# Allegro board test_fixture_4.brd

Outline 81.28 x 111.76 mm; copper layers: TOP, GROUND, MIDDLE, POWER, BOTTOM. Coordinates in mm from the lower left corner of the outline.
Outline path: rectangle 0,0 81.28,111.76

## Design rules (mm)
nets with their own width: min track width 0.152; nets ADP9 MISO2 MOSI1 MOSI2 N05337 N15041 N15045 N15127 N15131 N15240 N15268 N18999 N19124 N19488 N19578 N19618 N19633 N22932 N24595 N24653 N25786 N25790 N49174 N49178 N49182 N51133 N52935 N55207 N55211 N55215 N55219 N55223 N55410 N55414 N55418 N55422 N55426 N55430 N55434 N55502 N55506 N55510 N55514 N55518 N55522 N55526 N55530 N55534 N55538 N55542 N55546 N55550 N55554 N55558 N55562 N55566 N55570 N78033 N78056 N78319 N121520 OUTA PTE4 R1IN R1OUT R2IN R2OUT RXD1 RXD2 SPSCK1 SPSCK2 SS1_N SS2_N T1OUT T2OUT TXD1 TXD2 VIN VOUT VSS
nets with their own width: min track width 0.203; nets V3_3 V5_5 VCC
nets with their own width: min track width 0.254; nets AGND

## Placement (name value [footprint] x y rotation side)
C1  0.1u  [CAP196]  69.6 94.61 0 top
C2  10u  [CAP196]  48.39 87 0 top
C3  0.1u  [CAP196]  25.53 93.85 0 top
C4  0.1u  [CAP196]  25.53 99.95 0 top
C5  0.1u  [CAP196]  40.01 87 0 top
C6  10u  [CAP196]  25.53 90.3 180 top
C7  0.1u  [CAP196]  32.13 87 0 top
C9  0.1u  [CAP196]  22.86 57.91 0 top
C10  0.1u  [CAP196]  29.59 57.91 0 top
C11  0.1u  [CAP196]  43.05 57.91 0 top
C12  0.1u  [CAP196]  36.32 57.91 0 top
C13  1n  [CAP196]  49.78 57.91 0 top
C14  0.1u  [CAP196]  63.12 57.91 0 top
C16  2u  [CAP196]  23.88 74.93 90 top
C17  0.1u  [CAP196]  56.52 57.91 0 top
C18  10u  [CAP196]  25.53 81.15 0 top
C22  0.47u  [CAP196]  69.6 88.27 0 top
C23  33u  [CAP196]  69.72 57.91 0 top
D1  LED  [CAP196]  12.32 73.66 0 top
D2  LED  [CAP196]  28.57 71.12 0 top
D3  LED  [CAP196]  35.31 71.12 0 top
J1  HEADER 32  [32_PINS_CIR_CONN_RIGHT_ANGLE]  75.69 19.18 90 top
J3  HEADER 32  [32_PINS_CIR_CONN_RIGHT_ANGLE]  15.62 19.18 90 top
J5  CON10A  [CONN10]  57.78 8.26 0 top
J6  CON2  [CAP196]  12.32 70.48 180 top
NOREF  -  [unnamed]  78.74 109.22 0 top
NOREF#2  -  [unnamed]  78.74 2.54 0 top
NOREF#3  -  [unnamed]  2.54 109.22 0 top
NOREF#4  -  [unnamed]  2.54 2.54 0 top
R1  100k  [RES400]  13.84 93.85 0 top
R2  1.26k  [RES400]  58.17 90.3 0 top
R3  100k  [RES400]  18.29 93.85 0 top
R4  22.17k  [RES400]  54.23 90.3 0 top
R5  11.1k  [RES400]  62.87 90.42 0 top
R6  1k  [RES400]  44.2 82.55 90 top
R7  1k  [RES400]  40.13 72.39 270 top
R8  10k  [RES400]  47.75 29.34 0 top
R9  10k  [RES400]  47.62 22.23 180 top
R10  10k  [RES400]  64.52 28.19 0 top
R11  10k  [RES400]  64.39 43.05 0 top
R12  1k  [RES400]  17.4 66.67 0 top
U1  LM124A  [DIP14_3]  33.27 94.49 90 top
U3  MAX3222  [DIP18_3]  40.26 52.58 270 top
U4  MC9S08QE128_64  [MC9S08QE128_V2]  9.78 32.89 0 top
U5  CAT24C02  [DIP8_3]  53.21 39.24 0 top
U6  max550acpa  [DIP8_3]  51.18 51.69 0 top
U7  LT323/TO220  [TO220AB]  18.67 83.06 270 top
U8  LM3940/TO220  [TO220AB]  58.17 84.84 90 top

## Library data of the parts
C1-C7 C14 C16-C18 C22 C23 = C: Tolerance: ***; User Part Number: ***
C9-C13 = CAP: Tolerance: ***; User Part Number: ***
D1-D3 = LED: Tolerance: ***; User Part Number: ***
J1 J3 = HEADER 32
J5 = CON10A: User Part Number: ***
J6 = CON2: Tolerance: ***; User Part Number: ***
R1-R7 R12 = R: Tolerance: ***; User Part Number: ***
R8-R11 = RESISTOR: Tolerance: ***; User Part Number: ***
U1 = LM124A: Tolerance: ***; User Part Number: ***
U3 = MAX3222_2: Tolerance: ***; User Part Number: ***
U4 = MC9S08QE128_11
U5 = CAT24C02_3: Tolerance: ***; User Part Number: ***
U6 = max550acpa_3: Tolerance: ***; User Part Number: ***
U7 = LT323/TO220_0
U8 = LM3940/TO220_0

## Footprints (pads in the part's own frame, mm; a bottom-side part is the same pattern mirrored in y, then rotated)
32_PINS_CIR_CONN_RIGHT_ANGLE
  round 1.016 hole 0.711: 1(4,6) 2(4,4) 3(6,6) 4(6,4) 5(8,6) 6(8,4) 7(10,6) 8(10,4) 9(12,6) 10(12,4) 11(14,6) 12(14,4) 13(16,6) 14(16,4) 15(18,6) 16(18,4) 17(20,6) 18(20,4) 19(22,6) 20(22,4) 21(24,6) 22(24,4) 23(26,6) 24(26,4) 25(28,6) 26(28,4) 27(30,6) 28(30,4) 29(32,6) 30(32,4) 31(34,6) 32(34,4)
CAP196
  round 1.524 hole 0.914: 1(0,0) 2(0,2.54)
CONN10
  round 1.524 hole 0.914: 1(0,0) 2(0,2.54) 3(2.54,0) 4(2.54,2.54) 5(5.08,0) 6(5.08,2.54) 7(7.62,0) 8(7.62,2.54) 9(10.16,0) 10(10.16,2.54)
DIP8_3
  rect 1.524x1.524 hole 0.914: 1(0,0)
  round 1.524 hole 0.914: 2(0,-2.54) 3(0,-5.08) 4(0,-7.62) 5(7.62,-7.62) 6(7.62,-5.08) 7(7.62,-2.54) 8(7.62,0)
DIP14_3
  rect 1.524x1.524 hole 0.914: 1(0,0)
  round 1.524 hole 0.914: 2(0,-2.54) 3(0,-5.08) 4(0,-7.62) 5(0,-10.16) 6(0,-12.7) 7(0,-15.24) 8(7.62,-15.24) 9(7.62,-12.7) 10(7.62,-10.16) 11(7.62,-7.62) 12(7.62,-5.08) 13(7.62,-2.54) 14(7.62,0)
DIP18_3
  rect 1.524x1.524 hole 0.914: 1(0,0)
  round 1.524 hole 0.914: 2(0,-2.54) 3(0,-5.08) 4(0,-7.62) 5(0,-10.16) 6(0,-12.7) 7(0,-15.24) 8(0,-17.78) 9(0,-20.32) 10(7.62,-20.32) 11(7.62,-17.78) 12(7.62,-15.24) 13(7.62,-12.7) 14(7.62,-10.16) 15(7.62,-7.62) 16(7.62,-5.08) 17(7.62,-2.54) 18(7.62,0)
MC9S08QE128_V2
  round 1.524 hole 1.067: 1(8.026,0) 2(10.033,0) 3(8.026,-2.007) 4(10.033,-2.007) 5(8.026,-4.013) 6(10.033,-4.013) 7(8.026,-6.02) 8(10.033,-6.02) 9(8.026,-8.026) 10(10.033,-8.026) 11(8.026,-10.033) 12(10.033,-10.033) 13(8.026,-12.04) 14(10.033,-12.04) 15(8.026,-14.046) 16(10.033,-14.046) 17(12.04,-20.066) 18(12.04,-18.059) 19(14.046,-20.066) 20(14.046,-18.059) 21(16.053,-20.066) 22(16.053,-18.059) 23(18.059,-20.066) 24(18.059,-18.059) 25(20.066,-20.066) 26(20.066,-18.059) 27(22.073,-20.066) 28(22.073,-18.059) 29(24.079,-20.066) 30(24.079,-18.059) 31(26.086,-20.066) 32(26.086,-18.059) 33(32.664,-14.046) 34(30.658,-14.046) 35(32.664,-12.04) 36(30.658,-12.04) 37(32.664,-10.033) 38(30.658,-10.033) 39(32.664,-8.026) 40(30.658,-8.026) 41(32.664,-6.02) 42(30.658,-6.02) 43(32.664,-4.013) 44(30.658,-4.013) 45(32.664,-2.007) 46(30.658,-2.007) 47(32.664,0) 48(30.658,0) 49(26.086,5.359) 50(26.086,3.353) 51(24.079,5.359) 52(24.079,3.353) 53(22.073,5.359) 54(22.073,3.353) 55(20.066,5.359) 56(20.066,3.353) 57(18.059,5.359) 58(18.059,3.353) 59(16.053,5.359) 60(16.053,3.353) 61(14.046,5.359) 62(14.046,3.353) 63(12.04,5.359) 64(12.04,3.353)
RES400
  round 1.651 hole 1.067: 1(0,0) 2(0,10.16)
TO220AB
  round 2.032 hole 1.397: 1(0,0) 2(-2.54,0) 3(-5.08,0)
unnamed
  round 0.635 hole 3.175 unplated: (0,0)

## Nets
AGND: C1.1 C3.1 C4.1 C11.2 C12.2 C13.2 C14.1 C16.1 C17.1 C18.1 C22.1 C23.1 D1.2(CATHODE) D2.2(CATHODE) D3.2(CATHODE) J1.9 J1.10 J1.11 J6.2 R3.1 U1.11(V-) U3.16 U4.9(VREFL) U4.10(VSSAD) U4.11(VSS_2) U5.1(A0) U5.2(A1) U5.3(A2) U6.1(GND) U7.2 U8.2
V3_3: C13.1 C14.2 C17.2 C23.2 J1.6 J1.7 J1.8 R7.2 R8.1 R9.1 R10.2 R11.2 U3.1(E\N\) U3.17(VCC) U3.18(S\H\D\N\) U4.6(VDD) U4.7(VDDAD) U4.8(VREFH) U4.40(VDD_2) U5.8 U6.8(VDD) U8.3(OUT)
V5_5: C1.2 C18.2 C22.2 R1.2 R6.2 U1.4(V+) U7.3(VOUT) U8.1(IN)
VCC: C16.2 J6.1 R12.2 U7.1(VIN)
VIN: C6.1 J3.32
VSS: U5.4
ADP9: J3.21 U4.37(PTA7/TPM2CH2/ADP9)
MISO2: J3.6 J5.5 U4.46(PTD2/KBI2P2/MISO2)
MOSI1: J3.28 U4.59(PTE1/MOSI1) U6.4(DIN)
MOSI2: J1.1 J5.1 U4.1(PTD1/KBI2P1/MOSI2)
OUTA: U6.2(OUTA)
PTE4: J3.18 U4.39(PTE4)
R1IN: U3.14(R1IN)
R1OUT: U3.13(R1OUT) U4.34(PTB0/KBI1P4/RXD1/ADP4)
R2IN: U3.9(R2IN)
R2OUT: U3.10(R2OUT) U4.52(PTC6/RXD2/ACMP2+)
RXD1: J3.2
RXD2: J3.13
SPSCK1: J3.29 U4.60(PTE0/TPM2CLK/SPSCK1) U6.5(SCLK)
SPSCK2: J1.2 J5.3 U4.2(PTD0/KBI2P0/SPSCK2)
SS1_N: U6.3(CS_N)
SS2_N: J3.10 J5.9 U4.45(PTD3/KBI2P3/S\S\2\)
T1OUT: U3.15(T1OUT)
T2OUT: U3.8(T2OUT)
TXD1: J3.1 U3.12(T1IN) U4.33(PTB1/KBI1P5/TXD1/ADP5)
TXD2: J3.12 U3.11(T2IN) U4.51(PTC7/TXD2/ACMP2-)
VOUT: C2.2 J3.11 U4.50(PTA0/KBI1P0/TPM1CH0/ADP0/ACMP1)
N05337: J1.4 R11.1 U4.4(PTH6/SCL2) U5.6(SCL)
N15041: C9.1 U3.2(C1+)
N15045: C9.2 U3.4(C1-)
N15127: C10.1 U3.5(C2+)
N15131: C10.2 U3.6(C2-)
N15240: C11.1 U3.3(V+)
N15268: C12.1 U3.7(V-)
N18999: C3.2 R1.1 R3.2 U1.2(-)
N19124: C4.2 R2.2 U1.1(OUT) U1.3(+) U1.5(+)
N19488: C5.1 C7.1 R2.1 R5.1
N19578: C5.2 R4.2 U1.6(-)
N19618: C2.1 C7.2 R4.1 U1.7(OUT)
N19633: C6.2 R5.2
N22932: J1.5 U4.5(PTE7/TPM3CLK)
N24595: J3.14 U4.53(PTE3/S\S\1\)
N24653: J1.31 U4.54(PTE2/MISO1)
N25786: J1.12 R8.2 U4.12(PTB7/SCL1/EXTAL)
N25790: J1.13 R9.2 U4.13(PTB6/SDA1/XTAL)
N49174: J3.3 U4.35(PTF3/ADP13)
N49178: J3.4 U4.36(PTF2/ADP12)
N49182: J3.5 U4.44(PTD4/KBI2P4)
N49908: J3.7 U4.47(PTA3/KBI1P3/SCL1/ADP3)
N49958: J3.8 U4.48(PTA2/KBI1P2/SDA11/ADP2)
N51133: J1.3 R10.1 U4.3(PTH7/SDA2) U5.5(SDA)
N52935: J3.9 U4.49(PTA1/KBI1P1/TPM2CH0/ADP1/ACMP1)
N55207: J3.15 U4.55(PTG3/ADP19)
N55211: J3.16 U4.63(PTA5/IRQ/TPM1CLK/R\E\S\E\T\\)
N55215: J3.17 U4.64(PTA4/ACMP1O/BKGD/MS)
N55219: J3.19 U4.28(PTF6/ADP16)
N55223: J3.20 U4.29(PTF5/ADP15)
N55410: J3.23 U4.42(PTF1/ADP11)
N55414: J3.24 U4.43(PTF0/ADP10)
N55418: J3.25 U4.30(PTF4/ADP14)
N55422: J3.26 U4.31(PTB3/KBI1P7/MOSI1/ADP7)
N55426: J3.27 U4.32(PTB2/KBI1P6/SPSCK1/ADP6)
N55430: J3.30 U4.62(PTC4/TPM3CH4/R\S\T\O\)
N55434: J3.31 U4.61(PTC5/TPM3CH5/ACMP2O)
N55502: J1.14 U4.14(PTH1)
N55506: J1.15 U4.15(PTH0)
N55510: J1.16 U4.16(PTE6)
N55514: J1.17 U4.17(PTE5)
N55518: J1.18 U4.18(PTB5/TPM1CH1/SS1\)
N55522: J1.19 U4.19(PTB4/TPM2CH1/MISO1)
N55526: J1.20 U4.20(PTC3/TPM3CH3)
N55530: J1.21 U4.21(PTC2/TPM3CH2)
N55534: J1.22 U4.22(PTD7/KBI2P7)
N55538: J1.23 U4.23(PTD6/KBI2P6)
N55542: J1.24 U4.24(PTD5/KBI2P5)
N55546: J1.25 U4.25(PTC1/TPM3CH1)
N55550: J1.26 U4.26(PTC0/TPM3CH0)
N55554: J1.27 U4.27(PTF7/ADP17)
N55558: J1.28 U4.56(PTG2/ADP18)
N55562: J1.29 U4.57(PTG1)
N55566: J1.30 U4.58(PTG0)
N55570: J1.32 U4.38(PTA6/TPM1CH2/ADP8)
N78033: D1.1(ANODE) R12.1
N78056: D3.1(ANODE) R7.1
N78319: D2.1(ANODE) R6.1
N121520: J3.22 U4.41(VSS)

Pads without a net: J5 2 4 6 7 8 10; U1 8 9 10 12 13 14; U5 7; U6 6 7

## Via types
v1: diameter 0.61, hole 0.33, TOP to BOTTOM, 82 vias

## Routing (per net, layer and track width the routed paths; a pad name or vN(x,y) marks a point on that pad's centre or on a via; arc(x,y) is an arc through that point)
AGND: length 287.9
  TOP w0.254: v1(44.74,32.64) 68.23,32.64 J1.9 ; C14.1 66.74,54.29 v1(73.68,54.29) ; v1(30.16,73.66) D2.2 ; v1(54.41,36.7) U5.2 ; v1(15.81,93.85) R3.1 ; v1(45.2,52.32) 45.83,51.69 U6.1 ; C12.2 37.34,61.47 v1(44.64,61.47) ; C16.1 20.89,77.91 v1(15.81,77.91) ; v1(44.64,60.45) C11.2 ; v1(46.04,60.83) 49.4,60.83 C13.2 ; v1(68.01,94.61) C1.1
  GROUND w0.254: 17.81,23.99 U4.9 ; U4.9 18.68,24.87 ; U4.9 16.93,24.87 ; U4.9 17.81,25.74 ; 19.81,23.99 U4.10 ; U4.10 18.94,24.87 ; U4.10 20.69,24.87 ; U4.10 19.81,25.74 ; 43.05,59.58 C11.2 ; C11.2 43.05,61.33 ; C11.2 43.93,60.45 ; C11.2 42.18,60.45 ; 16.93,22.86 U4.11 ; U4.11 17.81,21.98 ; U4.11 18.68,22.86 ; U4.11 17.81,23.74 ; 24.65,93.85 C3.1 ; C3.1 25.53,92.98 ; C3.1 25.53,94.73 ; C3.1 26.4,93.85 ; 25.53,99.07 C4.1 ; C4.1 24.65,99.95 ; C4.1 26.4,99.95 ; C4.1 25.53,100.83 ; U5.3 54.09,34.16 ; U5.3 53.21,33.29 ; U5.3 53.21,35.04 ; U5.3 52.34,34.16 ; 69.72,57.04 C23.1 ; C23.1 70.6,57.91 ; C23.1 68.85,57.91 ; C23.1 69.72,58.79 ; J6.2 13.2,67.94 ; J6.2 12.32,67.07 ; J6.2 11.44,67.94 ; J6.2 12.32,68.82 ; 35.45,60.45 C12.2 ; C12.2 36.32,61.33 ; C12.2 37.2,60.45 ; C12.2 36.32,59.58 ; C22.1 70.47,88.27 ; C22.1 69.6,89.14 ; C22.1 69.6,87.39 ; C22.1 68.72,88.27 ; 69.6,93.74 C1.1 ; C1.1 68.72,94.61 ; C1.1 70.47,94.61 ; C1.1 69.6,95.49 ; J1.10 71.69,31.71 ; J1.10 72.23,31.18 ; J1.10 71.69,30.64 ; J1.10 71.16,31.18 ; 12.32,75.32 D1.2 ; D1.2 12.32,77.08 ; D1.2 11.44,76.2 ; D1.2 13.2,76.2 ; 52.34,36.7 U5.2 ; U5.2 53.21,37.58 ; U5.2 53.21,35.83 ; U5.2 54.09,36.7 ; U5.1 53.21,40.12 ; U5.1 53.21,38.37 ; U5.1 54.09,39.24 ; U5.1 52.34,39.24 ; R3.1 18.29,94.73 ; R3.1 18.29,92.98 ; R3.1 19.16,93.85 ; R3.1 17.41,93.85 ; D2.2 28.57,74.54 ; D2.2 27.7,73.66 ; D2.2 28.57,72.78 ; D2.2 29.45,73.66 ; U8.2 59.17,82.3 ; U8.2 57.16,82.3 ; U8.2 58.17,81.29 ; U8.2 58.17,83.3 ; U7.2 19.67,85.6 ; U7.2 18.67,86.6 ; U7.2 18.67,84.59 ; U7.2 17.67,85.6 ; C18.1 26.4,81.15 ; C18.1 24.65,81.15 ; C18.1 25.53,82.03 ; C18.1 25.53,80.28 ; 40.02,102.11 U1.11 ; U1.11 40.89,102.98 ; U1.11 40.89,101.23 ; U1.11 41.77,102.11 ; U6.1 51.18,52.57 ; U6.1 52.06,51.69 ; U6.1 51.18,50.81 ; U6.1 50.3,51.69 ; C17.1 57.39,57.91 ; C17.1 56.52,57.04 ; C17.1 56.52,58.79 ; C17.1 55.64,57.91 ; C14.1 63.12,58.79 ; C14.1 63.12,57.04 ; C14.1 62.24,57.91 ; C14.1 64,57.91 ; C16.1 24.75,74.93 ; C16.1 23.88,74.05 ; C16.1 23,74.93 ; C16.1 23.88,75.81 ; U3.16 36.06,44.96 ; U3.16 34.3,44.96 ; U3.16 35.18,45.83 ; U3.16 35.18,44.08 ; D3.2 35.31,74.54 ; D3.2 35.31,72.78 ; D3.2 36.18,73.66 ; D3.2 34.43,73.66 ; J1.11 70.23,33.18 ; J1.11 69.69,32.64 ; J1.11 69.16,33.18 ; J1.11 69.69,33.71 ; 69.16,31.18 J1.9 ; J1.9 70.23,31.18 ; J1.9 69.69,30.64 ; J1.9 69.69,31.71 ; 48.91,60.45 C13.2 ; C13.2 49.78,59.58 ; C13.2 50.66,60.45 ; C13.2 49.78,61.33
  MIDDLE w0.254: v1(51.88,103.06) 51.5,103.44 42.23,103.44 U1.11 ; v1(15.42,22.86) U4.11 ; v1(30.16,81.55) 29.77,81.15 C18.1 ; v1(74.03,31.18) J1.10 ; v1(54.41,36.7) 54.41,35.36 U5.3 ; D3.2 34.57,74.4 v1(30.54,74.4) ; v1(15.42,24.87) U4.9 ; v1(15.42,29.93) 15.52,29.83 22.73,29.83 22.73,24.87 U4.10 ; v1(15.43,67.94) J6.2 ; v1(72.38,88.27) C22.1 ; J1.11 69.92,33.18 69.92,32.57 v1(74.03,32.57) ; v1(56.45,82.3) U8.2 ; v1(30.16,91.25) 27.56,93.85 C3.1 ; v1(15.81,85.6) U7.2
  BOTTOM w0.254: v1(30.16,100.01) 25.59,100.01 C4.1 ; v1(73.62,57.91) C23.1 ; v1(46.04,38.24) 50.51,38.24 50.51,39.24 U5.1 ; C17.1 55.12,59.31 55.12,65.39 v1(55.82,66.09) ; v1(8.38,76.2) D1.2 ; v1(44.64,46.71) 44.64,46.71 36.93,46.71 U3.16
V3_3: length 202.3
  TOP w0.203: v1(21.01,26.87) U4.8 ; U4.7 17.34,26.4 v1(8.12,26.4) ; R11.2 67.09,53.21 67.09,52.39 v1(72.94,52.39) ; v1(46.04,57.91) C13.1 ; J1.6 v1(71.69,28.12) J1.8 ; v1(44.64,53.24) 43.98,52.58 U3.1 ; v1(46.04,72.39) R7.2 ; v1(45.78,22.23) R9.1
  MIDDLE w0.203: v1(44.64,45.38) 42.46,45.38 42.46,44.96 U3.18 ; v1(56.72,79.76) U8.3 ; C14.2 64.05,61.38 v1(72.94,61.38) ; U4.40 39.51,25.79 39.51,33.82 v1(44.64,33.82) ; U6.8 61.91,51.69 65.08,48.51 v1(72.94,48.51) ; U4.6 21.01,27.69 v1(21.01,26.87)
  POWER w0.203: 18.94,26.87 U4.8 ; U4.8 19.81,26 ; U4.8 19.81,27.75 ; U4.8 20.69,26.87 ; 16.93,26.87 U4.7 ; U4.7 17.81,26 ; U4.7 17.81,27.75 ; U4.7 18.68,26.87 ; C13.1 50.66,57.91 ; C13.1 48.91,57.91 ; C13.1 49.78,58.79 ; C13.1 49.78,57.04 ; 64.52,37.48 R10.2 ; R10.2 63.64,38.35 ; R10.2 65.39,38.35 ; R10.2 64.52,39.23 ; U3.1 41.14,52.58 ; U3.1 40.26,51.7 ; U3.1 39.38,52.58 ; U3.1 40.26,53.45 ; J1.6 72.23,27.18 ; J1.6 71.16,27.18 ; J1.6 71.69,27.71 ; J1.6 71.69,26.64 ; 59.96,39.24 U5.8 ; U5.8 60.83,38.37 ; U5.8 61.71,39.24 ; U5.8 60.83,40.12 ; 56.52,59.58 C17.2 ; C17.2 56.52,61.33 ; C17.2 57.39,60.45 ; C17.2 55.64,60.45 ; R8.1 48.63,29.34 ; R8.1 47.75,28.46 ; R8.1 46.88,29.34 ; R8.1 47.75,30.21 ; 40.26,44.08 U3.18 ; U3.18 40.26,45.83 ; U3.18 41.14,44.96 ; U3.18 39.38,44.96 ; C14.2 63.12,61.33 ; C14.2 63.12,59.58 ; C14.2 64,60.45 ; C14.2 62.24,60.45 ; 69.16,29.18 J1.7 ; J1.7 69.69,29.71 ; J1.7 70.23,29.18 ; J1.7 69.69,28.64 ; 50.29,71.51 R7.2 ; R7.2 49.42,72.39 ; R7.2 50.29,73.27 ; R7.2 51.17,72.39 ; R11.2 65.27,53.21 ; R11.2 63.51,53.21 ; R11.2 64.39,52.34 ; R11.2 64.39,54.09 ; U4.6 20.69,28.88 ; U4.6 18.94,28.88 ; U4.6 19.81,28 ; U4.6 19.81,29.76 ; U4.40 41.31,24.87 ; U4.40 40.44,25.74 ; U4.40 40.44,23.99 ; U4.40 39.56,24.87 ; 57.16,79.76 U8.3 ; U8.3 58.17,78.75 ; U8.3 58.17,80.76 ; U8.3 59.17,79.76 ; 57.92,51.69 U6.8 ; U6.8 58.8,52.57 ; U6.8 59.68,51.69 ; U6.8 58.8,50.81 ; 69.72,59.58 C23.2 ; C23.2 69.72,61.33 ; C23.2 68.85,60.45 ; C23.2 70.6,60.45 ; 37.72,44.08 U3.17 ; U3.17 37.72,45.83 ; U3.17 36.84,44.96 ; U3.17 38.6,44.96 ; R9.1 48.5,22.23 ; R9.1 46.75,22.23 ; R9.1 47.62,23.1 ; R9.1 47.62,21.35 ; J1.8 72.23,29.18 ; J1.8 71.69,28.64 ; J1.8 71.69,29.71 ; J1.8 71.16,29.18
  BOTTOM w0.203: v1(37.72,46.15) U3.17 ; v1(69.69,28.24) J1.7 ; C17.2 57.73,59.23 72.46,59.23 v1(72.94,58.76) ; R10.2 68.63,42.46 68.63,49.91 v1(72.94,49.91) ; v1(60.83,38.05) U5.8 ; v1(72.94,60.45) C23.2 ; v1(46.04,29.34) R8.1
V5_5: length 52.2
  TOP w0.203: v1(27.12,83.69) 25.53,83.69 ; v1(15.43,104.01) R1.2 ; v1(68.01,97.16) C1.2 ; v1(68.01,90.81) C22.2
  MIDDLE w0.203: U1.4 42.15,95.75 49.77,95.75 v1(50.1,95.41) ; v1(59.88,84.84) U8.1 ; v1(30.54,82.55) R6.2 ; v1(20.38,88.14) U7.3
  POWER w0.203: 17.67,88.14 U7.3 ; U7.3 18.67,87.13 ; U7.3 19.67,88.14 ; U7.3 18.67,89.14 ; 68.72,97.16 C1.2 ; C1.2 69.6,98.03 ; C1.2 70.47,97.16 ; C1.2 69.6,96.28 ; 24.65,83.69 25.53,83.69 ; 25.53,83.69 25.53,82.82 ; 25.53,83.69 26.4,83.69 ; 25.53,83.69 25.53,84.57 ; U8.1 58.17,85.84 ; U8.1 59.17,84.84 ; U8.1 58.17,83.83 ; U8.1 57.16,84.84 ; R1.2 14.72,104.01 ; R1.2 12.97,104.01 ; R1.2 13.84,103.14 ; R1.2 13.84,104.89 ; U1.4 41.77,94.49 ; U1.4 40.89,93.61 ; U1.4 40.89,95.36 ; U1.4 40.02,94.49 ; C22.2 69.6,91.68 ; C22.2 68.72,90.81 ; C22.2 70.47,90.81 ; C22.2 69.6,89.93 ; R6.2 34.91,82.55 ; R6.2 34.04,81.67 ; R6.2 34.04,83.43 ; R6.2 33.16,82.55
VCC: length 25.1
  TOP w0.203: v1(15.81,76.83) R12.2 ; v1(10.73,70.48) J6.1
  MIDDLE w0.203: v1(15.81,83.06) U7.1 ; v1(25.46,74) 22.26,74 C16.2
  POWER w0.203: 12.32,69.61 J6.1 ; J6.1 11.44,70.48 ; J6.1 13.2,70.48 ; J6.1 12.32,71.36 ; U7.1 19.67,83.06 ; U7.1 18.67,84.06 ; U7.1 17.67,83.06 ; U7.1 18.67,82.05 ; C16.2 21.34,75.81 ; C16.2 22.21,74.93 ; C16.2 20.46,74.93 ; C16.2 21.34,74.05 ; 17.4,75.96 R12.2 ; R12.2 16.52,76.83 ; R12.2 17.4,77.71 ; R12.2 18.28,76.83
VIN: length 47.9
  TOP w0.152: J3.32 13.99,55.55 13.99,87.41 16.87,90.3 C6.1
ADP9: length 52.4
  MIDDLE w0.152: J3.21 9.62,42.3 13.3,42.3 13.3,24.05 13.59,23.76 41.54,23.76 U4.37
MISO2: length 78
  MIDDLE w0.152: J5.5 61.96,7.35 44.74,7.35 44.74,31.79 41.34,31.79 U4.46
  BOTTOM w0.152: J3.6 12.33,27.89 37.44,27.89 U4.46
MOSI1: length 50.6
  BOTTOM w0.152: 25.98,43.99 25.98,43.79 25.83,43.64 U4.59 ; 25.98,43.99 25.98,49.18 J3.28 ; 25.98,43.99 51.1,43.99 U6.4
MOSI2: length 75.4
  TOP w0.152: v1(24.72,24.78) 36.47,24.78 37.43,23.83 55.82,23.83 v1(56.6,23.04) 56.74,23.18 J1.1
  MIDDLE w0.152: U4.1 18.91,31.79 24.72,31.79 v1(24.72,24.78) ; v1(56.6,23.04) 56.6,9.44 J5.1
PTE4: length 44
  TOP w0.152: J3.18 v1(16.32,39.18)
  BOTTOM w0.152: U4.39 43.97,26.39 43.97,33.52 42.21,35.28 20.22,35.28 v1(16.32,39.18)
R1OUT: length 35.2
  TOP w0.152: v1(34.96,24.27) v1(34.96,23.25)
  MIDDLE w0.152: U4.34 39.37,18.85 v1(34.96,23.25) ; U3.13 29.67,42.85 34.96,42.85 v1(34.96,24.27)
R2OUT: length 18.5
  MIDDLE w0.152: U3.10 24.87,40.03 31.66,40.03 32.75,38.94 32.75,37.35 U4.52
SPSCK1: length 89.4
  BOTTOM w0.152: 52.15,44.07 52.15,50.45 10.35,50.45 J3.29 ; 52.15,44.07 U6.5 ; 52.15,44.07 52.15,42.71 26.8,42.71 26.8,37.21 U4.60
SPSCK2: length 78.3
  TOP w0.152: v1(59.42,22.25) 70.77,22.25 J1.2 ; U4.2 20.78,33.86 43.36,33.86 44.02,33.2 v1(59.42,33.2)
  MIDDLE w0.152: v1(59.42,33.2) v1(59.42,22.25) 59.42,9.16 J5.3
SS2_N: length 80.5
  TOP w0.152: J3.10 12.33,31.89 41.44,31.89 U4.45
  MIDDLE w0.152: J5.9 66.76,7.07 43.9,7.07 43.9,29.43 U4.45
TXD1: length 74
  TOP w0.152: J3.1 12.99,19.81 41.48,19.81 U4.33
  BOTTOM w0.152: U3.12 24.05,45.92 10.61,45.92 10.61,36.18 9.18,36.18 8.91,35.9 8.91,23.89 J3.1
TXD2: length 44.8
  TOP w0.152: U3.11 17.41,39.89 8.63,39.89 8.63,30.47 10.89,30.47 10.89,32.45 J3.12
  MIDDLE w0.152: U3.11 25.98,41.45 30.66,41.45 U4.51
VOUT: length 86
  TOP w0.152: J3.11 10.61,34.17 33.79,34.17 U4.50
  MIDDLE w0.152: C2.2 38.62,79.77 38.62,39 U4.50
N05337: length 83.5
  TOP w0.152: U4.4 v1(38.9,30.89)
  MIDDLE w0.152: 61.73,43.05 R11.1 ; 61.73,43.05 41.94,43.05 38.9,40.01 v1(38.9,30.89) ; 61.73,43.05 61.73,35.06 U5.6
  BOTTOM w0.152: J1.4 70.68,26.19 70.68,34.16 U5.6
N15041: length 17.1
  BOTTOM w0.152: U3.2 35.08,55.22 25.55,55.22 C9.1
N15045: length 19.3
  MIDDLE w0.152: C9.2 27.28,60.45 28.46,61.63 32.64,61.63 U3.4
N15127: length 5.5
  MIDDLE w0.152: C10.1 30.02,57.48 30.02,52.65 U3.5
N15131: length 8.7
  MIDDLE w0.152: U3.6 27.56,58.42 C10.2
N15240: length 10.1
  TOP w0.152: U3.3 37.74,55.14 40.28,55.14 C11.1
N15268: length 13.5
  TOP w0.152: C12.1 33.92,55.51 27.95,55.51 U3.7
N18999: length 31.4
  TOP w0.152: U1.2 33.91,96.39 C3.2 18.29,96.39 ; 18.29,96.39 R3.2 ; 18.29,96.39 16.38,96.39 R1.1
N19124: length 40.5
  MIDDLE w0.152: C4.2 31.51,96.51 31.51,96.25 U1.1
  BOTTOM w0.152: 43.43,95.45 45.58,97.6 55.31,97.6 R2.2 ; 43.43,95.45 U1.5 ; 43.43,95.45 38.35,95.45 ; 38.35,95.45 34.24,95.45 U1.1 ; 38.35,95.45 U1.3
N19488: length 32.2
  TOP w0.152: R2.1 58.29,90.42 R5.1 ; C7.1 C5.1
  BOTTOM w0.152: R2.1 56.11,88.24 41.25,88.24 C5.1
N19578: length 18.7
  TOP w0.152: C5.2 41.02,89.53 U1.6 51.94,100.46 R4.2
N19618: length 30.1
  TOP w0.152: 47.14,88.57 47.14,89.94 48.51,91.31 48.51,91.33 ; 47.14,88.57 33.1,88.57 C7.2 ; 47.14,88.57 47.14,88.24 C2.1 ; R4.1 53.2,91.33 48.51,91.33 ; U1.7 48.51,91.33
N19633: length 44.7
  BOTTOM w0.152: C6.2 30.17,87.76 30.67,88.26 30.67,91.76 54.04,91.76 R5.2
N22932: length 56.8
  TOP w0.152: v1(21.79,25.97) 23.66,27.84 43.97,27.84 44.64,27.17 69.68,27.17 J1.5
  MIDDLE w0.152: v1(21.79,25.97) 17.41,25.97 16.9,26.47 16.9,27.98 U4.5
N24595: length 23
  TOP w0.152: U4.53 31.85,37.21 31.33,37.21 30.81,36.69 30.81,35.18 J3.14
N24653: length 47.7
  BOTTOM w0.152: J1.31 58.66,42.15 32.89,42.15 32.89,37.29 U4.54
N25786: length 74.6
  TOP w0.152: J1.12 70.68,32.17 70.68,25.91 v1(50.69,25.91) 24.4,25.91 21.35,22.86 U4.12
  MIDDLE w0.152: R8.2 50.69,36.56 v1(50.69,25.91)
N25790: length 76.4
  TOP w0.152: U4.13 18.77,21.82 v1(28.98,21.82) ; J1.13 v1(45.25,35.18)
  MIDDLE w0.152: 47.62,12.06 45.25,14.44 v1(45.25,21.7) v1(45.25,35.18)
  BOTTOM w0.152: v1(28.98,21.82) 45.14,21.82 v1(45.25,21.7)
N49174: length 37.9
  BOTTOM w0.152: J3.3 10.61,24.19 10.61,19.89 41.48,19.89 U4.35
N49178: length 31.5
  BOTTOM w0.152: J3.4 12.91,23.89 21.06,23.89 21.06,22.37 22.57,20.85 U4.36
N49182: length 32.1
  TOP w0.152: U4.44 21.06,28.88 21.06,27.89 10.33,27.89 J3.5
N49908: length 36.7
  BOTTOM w0.127: U4.47 41.49,33.85 15.13,33.85 14.26,32.98 14.26,30.38 10.83,30.38 J3.7
N49958: length 31.9
  BOTTOM w0.127: U4.48 39.38,31.84 16.67,31.84 16.67,29.18 J3.8
N51133: length 59.3
  TOP w0.152: U4.3 18.77,29.92 44.59,29.92 45.04,30.37 61.8,30.37 61.8,31.62 U5.5
  BOTTOM w0.152: U5.5 60.83,29.91 62.55,28.19 R10.1 67.53,25.18 J1.3
N52935: length 33.7
  TOP w0.152: J3.9 8.91,31.89 8.91,34.45 32.82,34.45 32.82,37.21 34.82,37.21 U4.49
N55207: length 21.4
  TOP w0.152: J3.15 10.61,38.17 18.4,38.17 v1(19.39,39.15)
  MIDDLE w0.152: v1(19.39,39.15) 28.94,39.15 U4.55
N55211: length 10.6
  TOP w0.152: J3.16 11.7,37.25 20.82,37.25 U4.63
N55215: length 16.1
  TOP w0.152: U4.64 8.91,36.25 8.91,38.47 J3.17
N55219: length 46.7
  MIDDLE w0.152: U4.28 29.83,16.85 11.93,16.85 10.74,18.05 10.74,41.18 J3.19
N55223: length 60.5
  TOP w0.152: U4.29 32.61,11.58 7.33,11.58 7.33,40.46 10.9,40.46 J3.20
N55410: length 62.6
  TOP w0.152: U4.42 23.88,26.87 20.91,23.9 7.61,23.9 7.61,40.17 12.61,40.17 12.61,43.89 10.91,43.89 J3.23
N55414: length 48.6
  BOTTOM w0.152: U4.43 43.41,29.84 43.41,33.29 42.24,34.47 11.33,34.47 10.91,34.88 10.91,44.47 J3.24
N55418: length 66.1
  BOTTOM w0.152: U4.30 32.33,16.36 7.61,16.36 7.61,49.89 10.33,49.89 10.33,47.89 J3.25
N55422: length 63.2
  MIDDLE w0.152: U4.31 34.96,13.73 9.06,13.73 9.06,46.3 11.62,46.3 J3.26
N55426: length 60.8
  BOTTOM w0.152: J3.27 8.63,48.19 8.63,16.92 33.78,16.92 U4.32
N55430: length 27.6
  TOP w0.152: U4.62 24.79,37.21 24.79,41.14 25.98,42.33 25.98,46.75 21.56,51.18 J3.30
N55434: length 28.2
  TOP w0.152: U4.61 23.83,46.18 11.18,46.18 10.63,46.73 10.63,52.17 J3.31
N55502: length 68.5
  TOP w0.152: U4.14 38.88,20.85 38.88,21.82 43.41,21.82 43.41,21.2 72.4,21.2 72.4,34.47 J1.14
N55506: length 78.4
  BOTTOM w0.152: U4.15 19.05,17.6 72.4,17.6 72.4,37.89 70.4,37.89 J1.15
N55510: length 70.1
  BOTTOM w0.152: U4.16 20.78,17.88 56,17.88 57.11,19 57.11,35.74 61.68,35.74 62.11,36.17 70.68,36.17 J1.16
N55514: length 80.5
  TOP w0.152: J1.17 68.4,37.89 v1(67.04,37.89)
  MIDDLE w0.152: v1(67.04,9.32) v1(67.04,37.89)
  BOTTOM w0.152: U4.17 21.82,9.32 v1(67.04,9.32)
N55518: length 74.6
  TOP w0.152: U4.18 23.62,16.64 72.68,16.64 72.68,38.19 J1.18
N55522: length 77.1
  TOP w0.152: J1.19 v1(52.29,41.18)
  MIDDLE w0.152: v1(52.29,41.18) v1(52.29,10.76)
  BOTTOM w0.152: U4.19 25.9,10.76 v1(52.29,10.76)
N55526: length 75.1
  TOP w0.152: U4.20 25.35,16.36 72.96,16.36 72.96,39.91 J1.20
N55530: length 79.6
  BOTTOM w0.152: U4.21 26.8,13.79 70.91,13.79 72.68,15.56 72.68,40.17 68.98,40.17 68.98,42.47 J1.21
N55534: length 83.3
  TOP w0.152: v1(63.5,18.11) 63.04,17.65 22.51,17.65 20.85,16 20.85,14.34 21.33,13.87 24.87,13.87 U4.22 ; J1.22 70.54,42.02 v1(63.5,42.02)
  MIDDLE w0.152: v1(63.5,18.11) v1(63.5,42.02)
N55538: length 83.1
  MIDDLE w0.152: J1.23 69.69,43.95 69.13,43.95 69.13,6.52 34.15,6.52 U4.23
N55542: length 97.7
  BOTTOM w0.152: U4.24 26.87,15.8 22.86,15.8 22.86,9.83 73.24,9.83 73.24,43.63 J1.24
N55546: length 82.3
  TOP w0.152: J1.25 70.4,47.89 73.52,47.89 73.52,13.79 30.81,13.79 U4.25
N55550: length 75.8
  TOP w0.152: U4.26 30.81,15.8 73.24,15.8 73.24,45.63 J1.26
N55554: length 81.1
  BOTTOM w0.152: U4.27 33.64,11.04 51.78,11.04 53.91,13.16 72.37,13.16 72.96,13.75 72.96,40.47 70.68,40.47 70.68,48.19 J1.27
N55558: length 52
  TOP w0.152: J1.28 70.68,48.17 33.61,48.17 31.34,45.9 31.34,39.11 30.81,38.58 30.81,37.21 U4.56
N55562: length 54.1
  TOP w0.152: J1.29 69.18,50.67 28.52,50.67 28.52,38.94 U4.57
N55566: length 56.8
  TOP w0.152: U4.58 28.8,37.21 28.8,48.74 30.45,50.39 70.9,50.39 J1.30
N55570: length 52.3
  BOTTOM w0.152: J1.32 70.68,52.17 69.23,52.17 55.75,38.69 55.75,24.26 55.32,23.83 41.4,23.83 U4.38
N78033: length 9.1
  MIDDLE w0.152: D1.1 17.4,68.58 R12.1
N78056: length 5.4
  TOP w0.152: D3.1 36.58,72.39 R7.1
N78319: length 20.4
  TOP w0.152: R6.1 36.55,74.9 34.62,74.9 30.84,71.12 D2.1
N121520: length 43.2
  BOTTOM w0.152: J3.22 12.89,41.91 12.89,41.89 19.84,34.94 42.16,34.94 43.69,33.41 43.69,28.12 U4.41

## Copper pours and planes (outline as drawn; the poured copper is in the pictures)
AGND on GROUND: 5.08,5.08 5.08,106.68 76.2,106.68 76.2,64.77 12.7,64.77 12.7,66.29 11.43,66.29 11.43,64.01 76.2,64.01 76.2,5.08
V3_3 on POWER: 42.16,79.38 42.16,64.52 5.08,64.52 5.08,5.08 76.2,5.08 76.2,82.42 53.98,82.42 53.98,79.38
V5_5 on POWER: 5.08,106.68 5.08,86.36 21.84,86.36 21.84,80.26 52.83,80.26 52.83,83.31 76.2,83.31 76.2,106.68
VCC on POWER: 5.08,84.33 5.08,65.28 41.66,65.28 41.66,79.38 20.95,79.38 20.95,84.33
